# EAGLE board main-board_v1_23 (EAGLE 7.6.0)
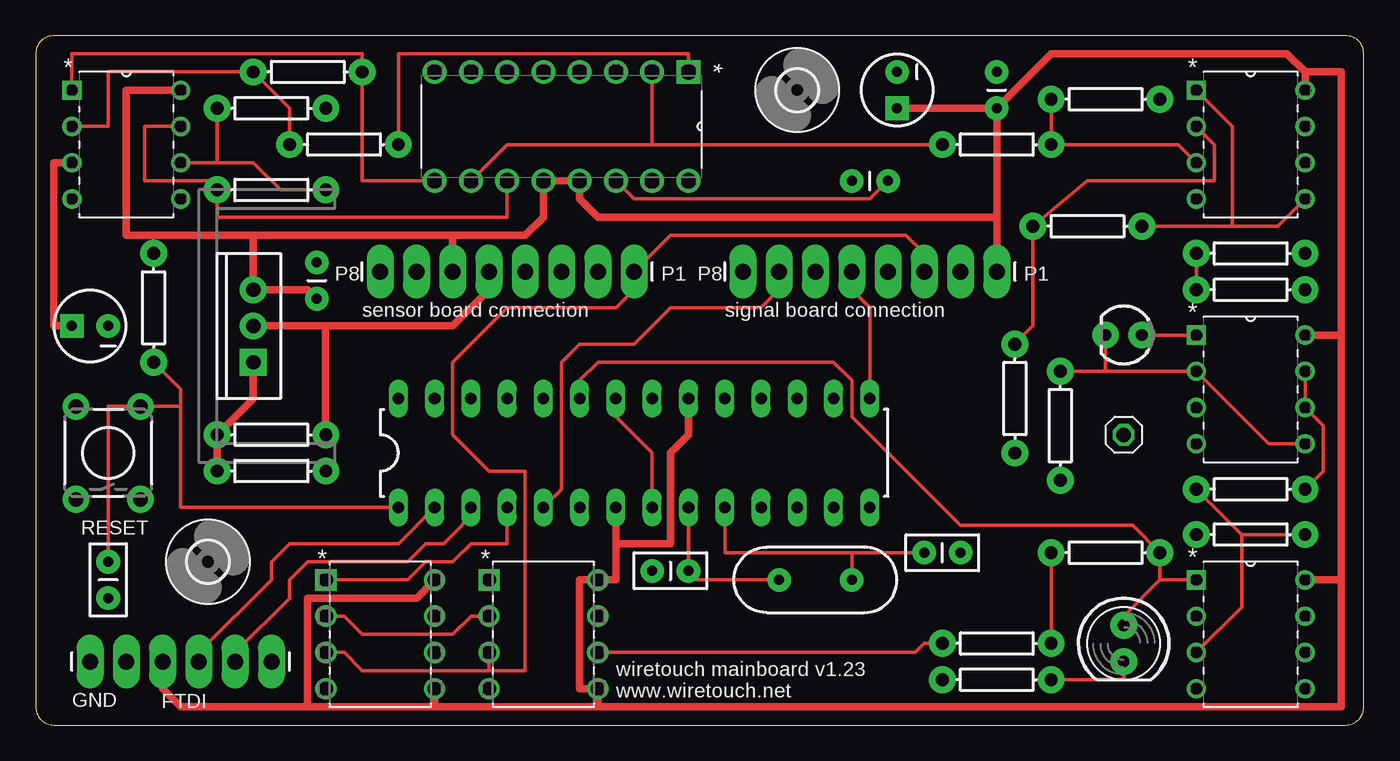
[diagram p0: board, top side]
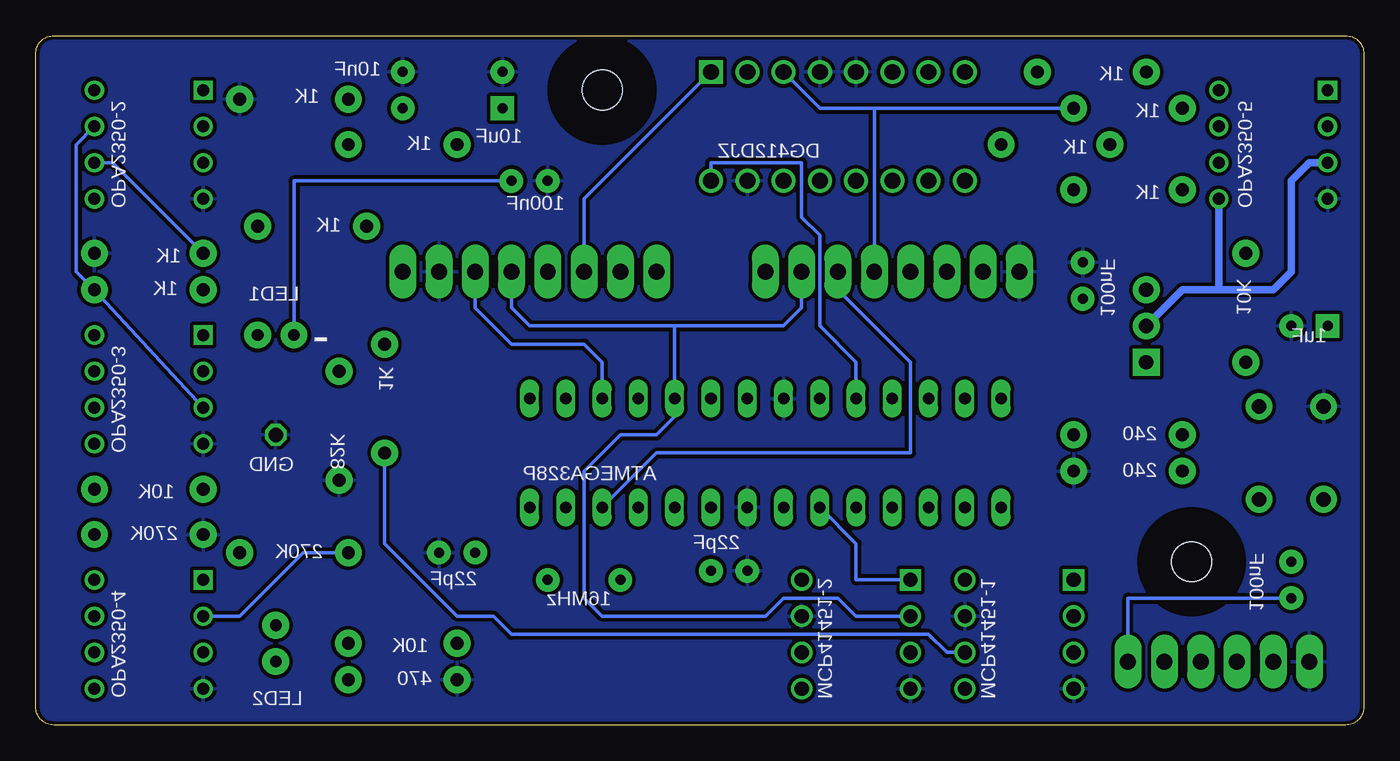
[diagram p1: board, bottom side, seen from below]

Size 93.02 x 48.26 mm. Coordinates in mm from the lower left corner, seen from the top.
Outline: 0,46.99 0,1.27 arc90 1.27,0 91.75,0 arc90 93.02,1.27 93.02,46.99 arc90 91.75,48.26 1.27,48.26 arc90 0,46.99
Copper layers (1*16): Top 0.035mm / dielectric 1.5mm / Bottom 0.035mm
Design rules "Fusion_eagle_rule_v1.1": minimum track width 6mil, minimum drill 12mil, track to track 6mil, track to pad 6mil, pad to pad 6mil, via to via 6mil, smd to smd 0mil, copper to edge 10mil, drill to drill 10mil, minimum pad ring 10mil, minimum via ring 6mil, stop-mask expansion 2mil, vias tented up to drill 100mil, thermal gap 10mil

## Footprints (pad centres in the part's own frame; a part is rotated, then mirrored left to right if it is on the bottom)
DIL28-3 = drill 0.813 long: 1 -16.51,-3.81; 2 -13.97,-3.81; 3 -11.43,-3.81; 4 -8.89,-3.81; 5 -6.35,-3.81; 6 -3.81,-3.81; 7 -1.27,-3.81; 8 1.27,-3.81; 9 3.81,-3.81; 10 6.35,-3.81; 11 8.89,-3.81; 12 11.43,-3.81; 13 13.97,-3.81; 14 16.51,-3.81; 15 16.51,3.81; 16 13.97,3.81; 17 11.43,3.81; 18 8.89,3.81; 19 6.35,3.81; 20 3.81,3.81; 21 1.27,3.81; 22 -1.27,3.81; 23 -3.81,3.81; 24 -6.35,3.81; 25 -8.89,3.81; 26 -11.43,3.81; 27 -13.97,3.81; 28 -16.51,3.81
CAP-PTH-SMALL = drill 0.7 pad 1.651: 1 0,0; 2 2.54,0
CPOL-RADIAL-10UF-25V = drill 0.7 pad 1.651 square: 1 1.27,0 | drill 0.7 pad 1.651: 2 -1.27,0
CAP-PTH-SMALL2 = drill 0.7 pad 1.651: 1 0,0; 2 2.54,0
1X06_LONGPADS = drill 1.118 pad 1.88 long: 1 0,0; 2 2.54,0; 3 5.08,0; 4 7.62,0; 5 10.16,0; 6 12.7,0
1X01 = drill 1.016 octagon: 1 0,0
LED3MM = drill 0.813 pad 1.88: A -1.27,0; K 1.27,0
LED5MM = drill 0.813 pad 1.88: A -1.27,0; K 1.27,0
DIP254P762X533-8 = drill 0.991 square: 1 -7.62,7.62 | drill 0.991: 2 -7.62,5.08; 3 -7.62,2.54; 4 -7.62,0; 5 0,0; 6 0,2.54; 7 0,5.08; 8 0,7.62
DIP254P762X508-8 = drill 0.838 square: 1 -7.62,7.62 | drill 0.838: 2 -7.62,5.08; 3 -7.62,2.54; 4 -7.62,0; 5 0,0; 6 0,2.54; 7 0,5.08; 8 0,7.62
AXIAL-0.3 = drill 0.9 pad 1.88: P$1 -3.81,0; P$2 3.81,0
TO220-ADJ = drill 1 pad 1.88 square: ADJ -2.54,0 | drill 1 pad 1.88: IN 2.54,0; OUT 0,0
TACTILE-PTH = drill 1.016 pad 1.88: 1 -3.251,2.261; 2 3.251,2.261; 3 -3.251,-2.261; 4 3.251,-2.261
2,8 = hole 2.8: 0,0
1X08_LONGPADS = drill 1.118 pad 1.88 long: 1 0,0; 2 2.54,0; 3 5.08,0; 4 7.62,0; 5 10.16,0; 6 12.7,0; 7 15.24,0; 8 17.78,0
DIP254P762X533-16 = drill 1.118 square: 1 -7.62,17.78 | drill 1.118: 2 -7.62,15.24; 3 -7.62,12.7; 4 -7.62,10.16; 5 -7.62,7.62; 6 -7.62,5.08; 7 -7.62,2.54; 8 -7.62,0; 9 0,0; 10 0,2.54; 11 0,5.08; 12 0,7.62; 13 0,10.16; 14 0,12.7; 15 0,15.24; 16 0,17.78
HC49US = drill 0.7 pad 1.651: 1 -2.54,0; 2 2.54,0

## Placement (x,y rotation side)
ATMEGA328P  AVR-MEGA8-PPTH  [DIL28-3]  41.91,19.05 0 top
C1  100nF  [CAP-PTH-SMALL]  19.68,29.84 90 top
C2  1uF  [CPOL-RADIAL-10UF-25V]  3.81,27.94 180 top
C3  10uF  [CPOL-RADIAL-10UF-25V]  60.33,44.45 270 top
C4  10nF  [CAP-PTH-SMALL]  67.31,43.18 90 top
C5  100nF  [CAP-PTH-SMALL]  59.69,38.1 180 top
C6  22pF  [CAP-PTH-SMALL2]  43.18,10.79 0 top
C7  22pF  [CAP-PTH-SMALL2]  64.77,12.06 180 top
C8  100nF  [CAP-PTH-SMALL2]  5.08,11.43 270 top
FTDI  [1X06_LONGPADS]  16.51,4.45 180 top
GNDHEADER  GND  [1X01]  76.2,20.32 0 top
LED1  [LED3MM]  76.2,27.3 180 top
LED2  [LED5MM]  76.2,5.71 270 top
MCP41451-1  MCP4151-503E/P  [DIP254P762X533-8]  27.94,2.54 0 top
MCP41451-2  MCP4151-503E/P  [DIP254P762X533-8]  39.37,2.54 0 top
OPA2350-2  OPA2350PA  [DIP254P762X508-8]  88.9,36.83 0 top
OPA2350-3  OPA2350PA  [DIP254P762X508-8]  88.9,19.68 0 top
OPA2350-4  OPA2350PA  [DIP254P762X508-8]  88.9,2.54 0 top
OPA2350-5  OPA2350PA  [DIP254P762X508-8]  10.16,36.83 0 top
R1  240  [AXIAL-0.3]  16.51,17.78 180 top
R2  240  [AXIAL-0.3]  16.51,20.32 0 top
R3  1K  [AXIAL-0.3]  73.66,34.92 0 top
R4  82K  [AXIAL-0.3]  71.75,20.95 90 top
R5  1K  [AXIAL-0.3]  74.93,43.81 180 top
R6  1K  [AXIAL-0.3]  67.31,40.64 0 top
R7  1K  [AXIAL-0.3]  85.09,33.02 180 top
R8  1K  [AXIAL-0.3]  85.09,30.48 0 top
R9  10K  [AXIAL-0.3]  85.09,16.51 180 top
R10  270K  [AXIAL-0.3]  74.93,12.06 0 top
R11  10K  [AXIAL-0.3]  67.31,5.71 0 top
R13  270K  [AXIAL-0.3]  85.09,13.34 0 top
R14  470  [AXIAL-0.3]  67.31,3.17 0 top
R15  10K  [AXIAL-0.3]  8.26,29.21 270 top
R16  1K  [AXIAL-0.3]  19.05,45.72 180 top
R17  1K  [AXIAL-0.3]  21.59,40.64 0 top
R18  1K  [AXIAL-0.3]  16.51,43.18 0 top
R19  1K  [AXIAL-0.3]  16.51,37.47 0 top
R20  1K  [AXIAL-0.3]  68.58,22.86 90 top
REGULATOR  2.5V  [TO220-ADJ]  15.24,27.94 90 top
RESET  Omron B3F momentary on switch  [TACTILE-PTH]  5.08,19.05 90 top
SCREW1  MOUNT-HOLE2.8  [2,8]  12.06,11.43 0 top
SCREW2  MOUNT-HOLE2.8  [2,8]  53.34,44.45 0 top
SENSOR-BOARD  [1X08_LONGPADS]  41.91,31.75 180 top
SIGNAL-BOARD  [1X08_LONGPADS]  67.31,31.75 180 top
SWITCH  DG412DJZ  [DIP254P762X533-16]  27.94,38.1 270 top
Y1  16MHz  [HC49US]  54.61,10.16 180 top

## Library data of the parts
ATMEGA328P = SparkFun-DigitalIC
C1-C8 R1-R11 R13-R20 = SparkFun-Passives
FTDI SENSOR-BOARD SIGNAL-BOARD = SparkFun-Connectors
GNDHEADER = pinhead
LED1 LED2 = SparkFun-LED
MCP41451-1 MCP41451-2 = gkaindl; MPN: MCP4151-503E/P; OC_FARNELL: 1840819; OC_NEWARK: 77M2694; PACKAGE: DIP-8; SUPPLIER: Microchip
OPA2350-2-OPA2350-5 = gkaindl; MPN: OPA2350PA; OC_FARNELL: 4353316; OC_NEWARK: 75C4730; PACKAGE: PDIP; SUPPLIER: Texas Instruments
REGULATOR = SparkFun-PowerIC
RESET = SparkFun-Electromechanical
SCREW1 SCREW2 = holes
SWITCH = gkaindl; MPN: DG412DJZ; OC_FARNELL: 1561997; OC_NEWARK: 79K6183; PACKAGE: PDIP-16; SUPPLIER: INTERSIL
Y1 = SparkFun-FreqCtrl

## Nets
2.8V: C2.1 OPA2350-5.3 OPA2350-5.5 R2.P$2 REGULATOR.OUT SENSOR-BOARD.5
5V: ATMEGA328P.7 ATMEGA328P.20 C1.1 C3.1 C4.1 FTDI.4 MCP41451-1.5 MCP41451-1.8 MCP41451-2.5 MCP41451-2.8 OPA2350-2.8 OPA2350-3.8 OPA2350-4.8 OPA2350-5.8 R15.P$1 REGULATOR.IN SENSOR-BOARD.6 SIGNAL-BOARD.1 SWITCH.12 SWITCH.13
DEMUX_IN: R18.P$2 SENSOR-BOARD.4 SWITCH.3
DIGI_POT1: MCP41451-1.6 R20.P$1
DIGI_POT2: MCP41451-2.6 R11.P$1
GND: ATMEGA328P.8 ATMEGA328P.22 C1.2 C2.2 C3.2 C4.2 C5.2 C6.1 C7.1 FTDI.6 GNDHEADER.1 MCP41451-1.4 MCP41451-1.7 MCP41451-2.4 MCP41451-2.7 OPA2350-2.4 OPA2350-3.4 OPA2350-4.4 OPA2350-5.4 R1.P$1 R4.P$1 R5.P$1 R7.P$1 R13.P$1 R14.P$1 RESET.2 SENSOR-BOARD.8 SIGNAL-BOARD.2 SWITCH.4 SWITCH.5 SWITCH.15
N$1: R6.P$1 SWITCH.2 SWITCH.10
N$2: OPA2350-2.1 OPA2350-2.5 R3.P$2
N$3: R1.P$2 R2.P$1 REGULATOR.ADJ
N$4: OPA2350-2.2 R3.P$1 R20.P$2
N$5: OPA2350-2.3 R5.P$2 R6.P$2
N$6: OPA2350-2.6 R7.P$2 R8.P$1
N$7: OPA2350-4.2 R10.P$1 R11.P$2
N$8: ATMEGA328P.24 SWITCH.16
N$9: LED1.A OPA2350-3.1
N$10: OPA2350-2.7 OPA2350-3.3 R8.P$2
N$11: C5.1 LED1.K OPA2350-3.2 OPA2350-3.5 R4.P$2 SWITCH.14
N$12: OPA2350-3.6 OPA2350-3.7 R9.P$1
N$13: OPA2350-4.3 R9.P$2 R13.P$2
N$14: ATMEGA328P.23 LED2.A OPA2350-4.1 R10.P$2
N$15: ATMEGA328P.6 MCP41451-2.1
N$16: OPA2350-5.6 R18.P$1 R19.P$2
N$17: LED2.K R14.P$2
N$18: ATMEGA328P.9 C6.2 Y1.2
N$19: ATMEGA328P.10 C7.2 Y1.1
N$20: ATMEGA328P.1 C8.1 R15.P$2 RESET.4
N$21: ATMEGA328P.3 FTDI.2
N$22: ATMEGA328P.2 FTDI.3
N$23: C8.2 FTDI.1
N$24: OPA2350-5.1 R16.P$1 SWITCH.9
N$25: OPA2350-5.2 R16.P$2 R17.P$1
N$27: OPA2350-5.7 R19.P$1 SWITCH.11
N$28: ATMEGA328P.4 MCP41451-1.1
N$127: ATMEGA328P.12 SENSOR-BOARD.3
SHIFT_CLK: ATMEGA328P.19 MCP41451-1.2 MCP41451-2.2 SENSOR-BOARD.2 SIGNAL-BOARD.4
SHIFT_LATCH: ATMEGA328P.15 SIGNAL-BOARD.5
SHIFT_SER: ATMEGA328P.17 MCP41451-1.3 MCP41451-2.3 SENSOR-BOARD.1 SIGNAL-BOARD.3
SIG_DIG: ATMEGA328P.5 SIGNAL-BOARD.7
SIG_REF: R17.P$2 SIGNAL-BOARD.6 SWITCH.1

## Tracks (layer width: path | path; a pad name or v marks a point on that pad's centre or on a via)
2.8V
  Top 0.508: OPA2350-5.3 1.27,39.37 1.27,27.94 C2.1 | R2.P$2 20.32,27.94 | 20.32,27.94 REGULATOR.OUT | 20.32,27.94 29.21,27.94 31.75,30.48 SENSOR-BOARD.5
  Bottom 0.508: OPA2350-5.3 3.81,39.37 5.08,38.1 5.08,31.75 6.35,30.48 10.16,30.48 | OPA2350-5.5 10.16,30.48 | REGULATOR.OUT 12.7,30.48 10.16,30.48
5V
  Top 0.254: R15.P$1 8.26,34.29
  Top 0.508: 91.44,27.3 91.44,45.72 88.9,45.72 | 91.44,27.3 OPA2350-3.8 | OPA2350-4.8 91.44,10.16 | 91.44,10.16 91.44,27.3 | FTDI.4 8.89,2.54 10.16,1.27 19.05,1.27 | 19.05,1.27 27.94,1.27 | MCP41451-1.5 27.94,1.27 | 27.94,1.27 39.37,1.27 | SENSOR-BOARD.6 29.21,34.29 | 29.21,34.29 34.29,34.29 35.56,35.56 SWITCH.12 SWITCH.13 38.1,36.83 39.37,35.56 67.31,35.56 | 15.24,34.29 REGULATOR.IN 19.05,30.48 C1.1 | 15.24,34.29 29.21,34.29 | OPA2350-5.8 6.35,44.45 6.35,34.29 8.26,34.29 15.24,34.29 | SIGNAL-BOARD.1 67.31,35.56 | MCP41451-1.8 26.67,8.89 19.05,8.89 19.05,1.27 | ATMEGA328P.7 40.64,12.7 | 40.64,12.7 40.64,10.16 MCP41451-2.8 38.1,10.16 38.1,2.54 MCP41451-2.5 39.37,1.27 | 39.37,1.27 91.44,1.27 91.44,10.16 | ATMEGA328P.20 45.72,20.32 44.45,19.05 44.45,12.7 40.64,12.7 | OPA2350-2.8 88.9,45.72 | 67.31,35.56 C4.1 | C4.1 71.12,46.99 87.63,46.99 88.9,45.72 | C3.1 C4.1
DEMUX_IN
  Bottom 0.254: SENSOR-BOARD.4 34.29,43.18 | SWITCH.3 38.1,43.18 34.29,43.18 | 34.29,43.18 R18.P$2
DIGI_POT1
  Bottom 0.254: MCP41451-1.6 29.21,5.08 30.48,6.35 59.69,6.35 60.96,7.62 63.5,7.62 68.58,12.7 R20.P$1
DIGI_POT2
  Top 0.254: MCP41451-2.6 61.59,5.08 62.23,5.71 R11.P$1
GND
  Top 0.254: ATMEGA328P.22 40.64,21.59 43.18,19.05 ATMEGA328P.8
  pour Bottom (isolate 0.254): 0,48.26 0,0 93.34,0 93.34,48.26
N$1
  Top 0.254: SWITCH.10 33.02,40.64 43.18,40.64 | SWITCH.2 43.18,40.64 | 43.18,40.64 R6.P$1
N$2
  Top 0.254: OPA2350-2.1 83.82,41.91 83.82,34.92 | 83.82,34.92 87,34.92 OPA2350-2.5 | R3.P$2 83.82,34.92
N$3
  Top 0.508: REGULATOR.ADJ 15.24,22.86 R2.P$1 R1.P$2
N$4
  Top 0.254: R20.P$2 69.85,27.94 R3.P$1 73.66,38.1 82.55,38.1 82.55,40.64 OPA2350-2.2
N$5
  Top 0.254: R5.P$2 R6.P$2 80.01,40.64 OPA2350-2.3
N$6
  Top 0.254: R8.P$1 R7.P$2
  Bottom 0.254: OPA2350-2.6 87.63,39.37 R7.P$2
N$7
  Top 0.254: R11.P$2 R10.P$1
  Bottom 0.254: OPA2350-4.2 78.74,7.62 74.3,12.06 R10.P$1
N$8
  Bottom 0.254: SWITCH.16 45.72,39.37 39.37,39.37 39.37,35.56 38.1,34.29 38.1,27.94 35.56,25.4 ATMEGA328P.24
N$9
  Top 0.254: LED1.A OPA2350-3.1
N$10
  Bottom 0.254: OPA2350-2.7 90.17,40.64 90.17,31.75 R8.P$2 OPA2350-3.3
N$11
  Top 0.254: LED1.K 74.93,24.77 | 74.93,24.77 R4.P$2 | OPA2350-3.5 86.36,19.68 OPA2350-3.2 74.93,24.77 | SWITCH.14 41.91,36.83 58.42,36.83 C5.1
  Bottom 0.254: C5.1 74.93,38.1 LED1.K
N$12
  Top 0.254: OPA2350-3.7 OPA2350-3.6 90.17,20.95 90.17,17.78 R9.P$1
N$13
  Top 0.254: R13.P$2 84.45,13.34 | 84.45,13.34 R9.P$2 | 84.45,13.34 84.45,8.26 OPA2350-4.3
N$14
  Top 0.254: OPA2350-4.1 78.74,10.16 | 78.74,10.16 R10.P$2 76.83,13.97 64.77,13.97 57.15,21.59 57.15,24.13 55.88,25.4 39.37,25.4 38.1,24.13 ATMEGA328P.23 | 78.74,10.16 76.2,7.62 LED2.A
N$15
  Bottom 0.254: MCP41451-2.1 35.56,10.16 35.56,12.7 ATMEGA328P.6
N$16
  Top 0.254: OPA2350-5.6 12.7,39.37 | R18.P$1 12.7,39.37 | 12.7,39.37 15.24,39.37 17.14,37.47 R19.P$2
N$17
  Top 0.254: LED2.K 76.2,3.17 R14.P$2
N$18
  Top 0.254: ATMEGA328P.9 C6.2 46.35,10.16 Y1.2
N$19
  Top 0.254: Y1.1 57.15,12.06 | 57.15,12.06 48.26,12.06 ATMEGA328P.10 | 57.15,12.06 C7.2
N$20
  Top 0.254: R15.P$2 10.16,23.5 10.16,22.23 | C8.1 5.08,22.3 RESET.4 10.08,22.3 10.16,22.23 | ATMEGA328P.1 10.16,15.24 10.16,22.23
N$21
  Top 0.254: ATMEGA328P.3 29.84,13.97 28.57,12.7 27.3,12.7 26.04,11.43 19.05,11.43 17.78,10.16 17.78,8.89 13.97,5.08 FTDI.2
N$22
  Top 0.254: ATMEGA328P.2 25.4,12.7 17.78,12.7 16.51,11.43 16.51,10.16 11.43,5.08 FTDI.3
N$23
  Bottom 0.254: FTDI.1 16.51,8.89 C8.2
N$24
  Top 0.254: SWITCH.9 22.86,38.1 R16.P$1 22.86,46.99 2.54,46.99 OPA2350-5.1
N$25
  Top 0.254: OPA2350-5.2 5.08,41.91 5.08,45.72 R16.P$2 17.78,43.18 R17.P$1
N$27
  Top 0.254: SWITCH.11 33.02,35.56 12.7,35.56 R19.P$1 12.06,38.1 7.62,38.1 7.62,41.91 OPA2350-5.7
N$28
  Top 0.254: ATMEGA328P.4 33.02,12.7 30.48,12.7 29.21,11.43 27.3,11.43 26.04,10.16 MCP41451-1.1
N$127
  Bottom 0.254: ATMEGA328P.12 49.53,19.05 31.75,19.05 31.75,25.4 36.83,30.48 SENSOR-BOARD.3
SHIFT_CLK
  Top 0.254: MCP41451-2.2 30.48,7.62 29.21,6.35 22.86,6.35 21.59,7.62 MCP41451-1.2
  Bottom 0.254: SENSOR-BOARD.2 39.37,29.21 40.64,27.94 48.26,27.94 | SIGNAL-BOARD.4 59.69,29.21 58.42,27.94 48.26,27.94 | MCP41451-2.2 35.56,7.62 36.83,8.89 40.64,8.89 41.91,7.62 53.34,7.62 54.61,8.89 54.61,17.78 52.07,20.32 49.53,20.32 48.26,21.59 ATMEGA328P.19 48.26,27.94
SHIFT_LATCH
  Top 0.254: SIGNAL-BOARD.5 57.15,30.48 58.42,29.21 ATMEGA328P.15
SHIFT_SER
  Top 0.254: 31.75,3.81 22.86,3.81 21.59,5.08 MCP41451-1.3 | 31.75,3.81 34.29,3.81 34.29,17.78 31.75,17.78 29.21,20.32 29.21,25.4 33.02,29.21 40.64,29.21 41.91,30.48 SENSOR-BOARD.1 44.45,34.29 60.96,34.29 62.23,33.02 SIGNAL-BOARD.3 | 31.75,3.81 MCP41451-2.3
  Bottom 0.254: SIGNAL-BOARD.3 62.23,29.21 59.69,26.67 54.61,26.67 53.34,25.4 ATMEGA328P.17
SIG_DIG
  Top 0.254: SIGNAL-BOARD.7 52.07,30.48 50.8,29.21 44.45,29.21 41.91,26.67 38.1,26.67 36.83,25.4 36.83,16.51 ATMEGA328P.5
SIG_REF
  Top 0.254: SWITCH.1 45.72,46.99 25.4,46.99 R17.P$2
  Bottom 0.254: SWITCH.1 54.61,36.83 SIGNAL-BOARD.6

## Text on the board
tPlace: P8 | P1 | P8 | P1 | sensor board connection | signal board connection | wiretouch mainboard v1.23 / www.wiretouch.net | GND
bPlace: - | GND